# Altium PCB pcb.PcbDoc
Units mil, origin at the board's own origin, x right, y up, seen from the top; angles counter-clockwise.
Board outline 1945 x 1927 mil, 2 copper layers (Top Layer, Bottom Layer); 53 components, 19 nets, 132 pads, 85 vias.
Unrouted connection lines stored in the file: 37.
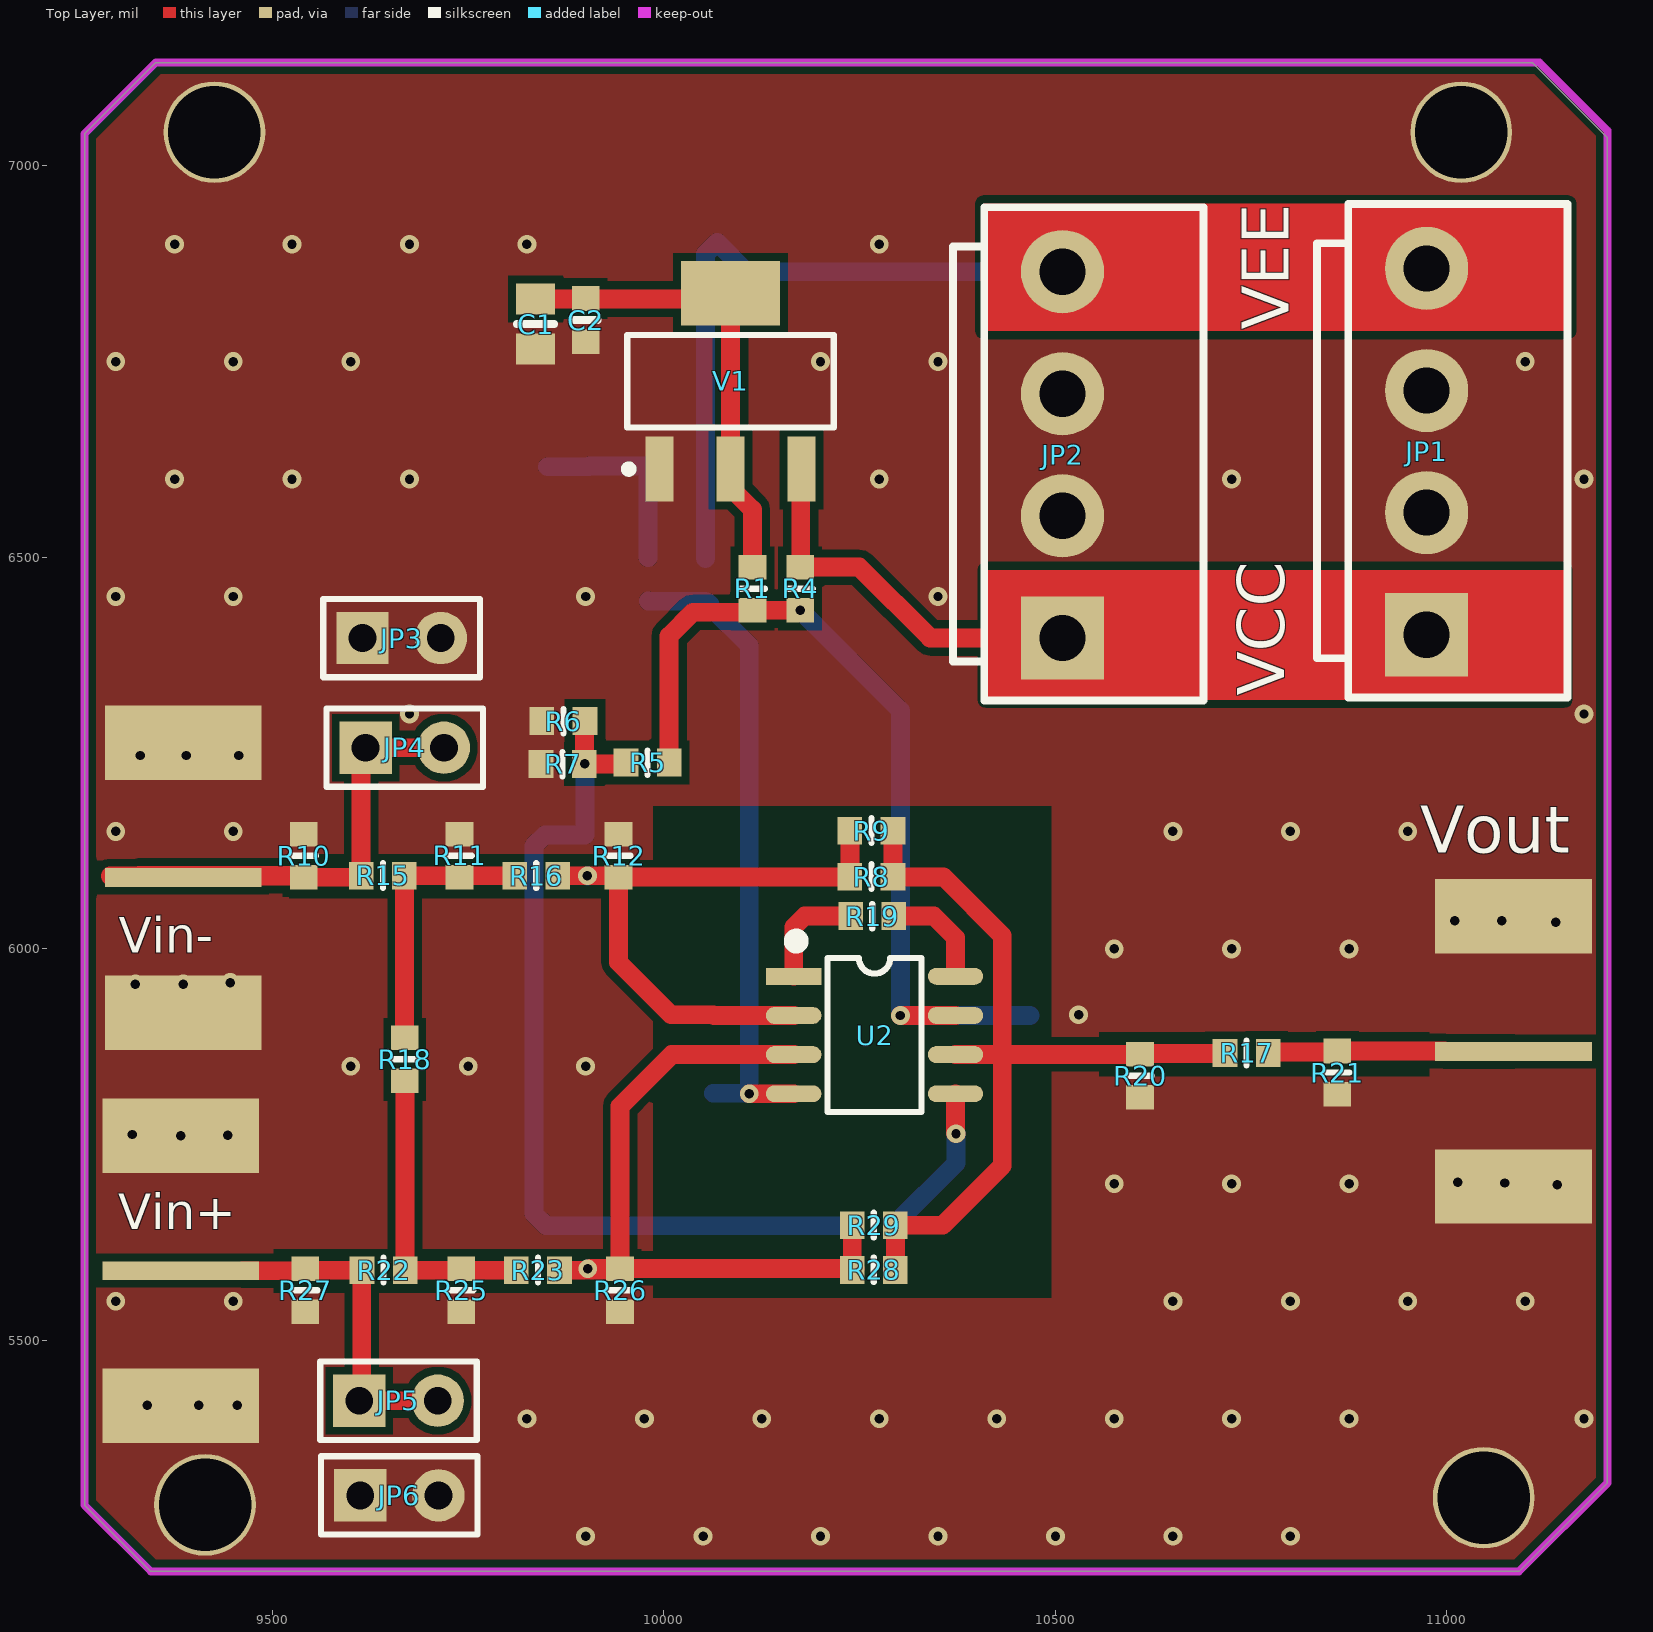
[diagram p0: Top Layer view]
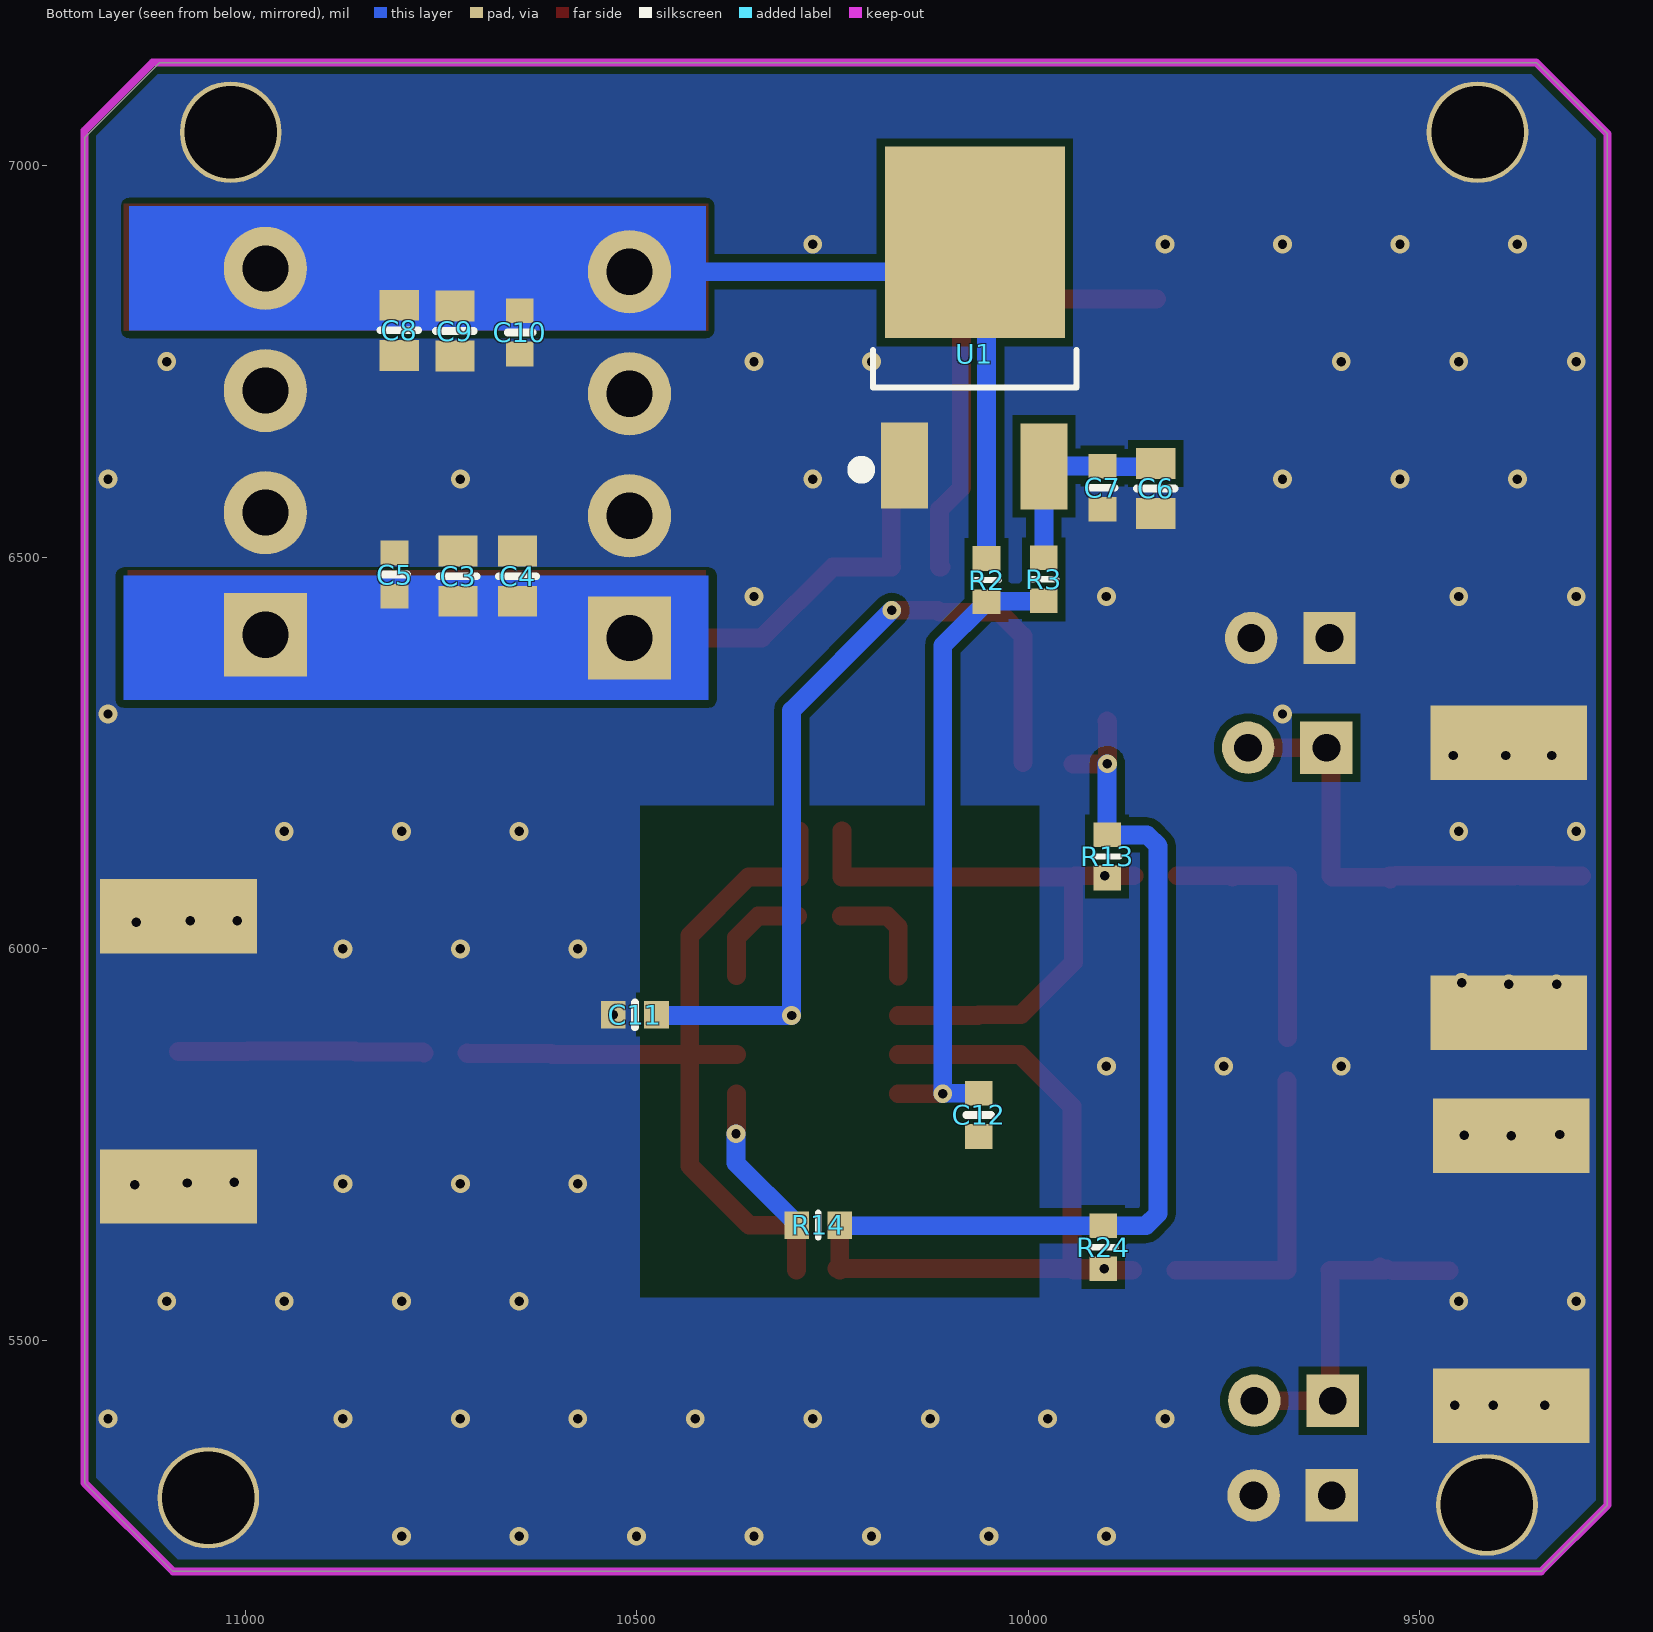
[diagram p1: Bottom Layer view, seen from below]

## Layer stack, top to bottom
Top Solder: solder mask 0.4, Solder Resist, Dk 3.5
Top Layer: signal copper 1.4
Dielectric 1: dielectric 12.6, FR-4, Dk 4.8
Bottom Layer: signal copper 1.4
Bottom Solder: solder mask 0.4, Solder Resist, Dk 3.5

## Board outline
9260,5289.59 9344.59,5205 11092,5205 11205,5318 11205,7036 11109,7132 9351,7132 9260,7041

## Design rules (kind name [scope] priority, off if disabled: settings)
Clearance [All] p1: gap=10 ignorepadtopadclearanceinfootprint=FALSE except(0: Arc-Hole Track-Hole SMDPad-Hole THPad-Hole Via-Hole Fill-Hole Poly-Hole Region-Hole Text-Hole)
PlaneConnect [All] p1: planeconnectstyle=Direct reliefexpansion=20 reliefentries=4 reliefconductorwidth=10 reliefairgap=10
PolygonConnect [All] p1: connectstyle=Direct reliefconductorwidth=10 reliefentries=4 polygonreliefangle="90 Angle" airgapwidth=10
RoutingVias [All] p1: holewidth=28 width=50 viastyle="Through Hole" minholewidth=28 minwidth=50 maxholewidth=28 maxwidth=50
SolderMaskExpansion [All] p1: expansion=4 istentingtop=FALSE
Width Width_1 [All] p1: maxlimit=24 minlimit=24 preferedwidth=24
Width PWR [InNetClass('PWR')] p2: maxlimit=36 minlimit=36 preferedwidth=36
29 further rules are at their usual default settings.

## Components (designator, comment, footprint, x,y, rotation, side; value= is the part's Value field where it differs from the comment)
C1 "Cap-S" C0805-L 9836,6798 r90 top value=10μF
C2 "Cap-S" C0603-L 9900,6803 r90 top value=100nF
C3 "Cap-S" C0805-L 10728,6476 r270 bottom value=47μF
C4 "Cap-S" C0805-L 10652,6476 r270 bottom value=10μF
C5 "Cap-S" C0603-L 10809,6478 r270 bottom value=100nF
C6 "Cap-S" C0805-L 9837,6588 r90 bottom value=10μF
C7 "Cap-S" C0603-L 9905,6589 r90 bottom value=100nF
C8 "Cap-S" C0805-L 10803,6790 r270 bottom value=47μF
C9 "Cap-S" C0805-L 10732,6789 r270 bottom value=10μF
C10 "Cap-S" C0603-L 10649,6787.38 r270 bottom value=100nF
C11 "Cap-S" C0603-L 10502,5916 r0 bottom value=100nF
C12 "Cap-S" C0603-L 10063,5788 r90 bottom value=100nF
JP1 "HDR-1X4" VH3.96-LI-4P 10974,6635.05 r90 top
JP2 "HDR-1X4" VH3.96-LI-4P 10509,6630.95 r90 top
JP3 "HDR-1X2" HDR2.54-LI-2P 9665,6397 r0 top
JP4 "HDR-1X2" HDR2.54-LI-2P 9669,6257 r0 top
JP5 "HDR-1X2" HDR2.54-LI-2P 9661,5423 r0 top
JP6 "HDR-1X2" HDR2.54-LI-2P 9662,5302 r0 top
R1 "R" R0603-L 10113,6460 r270 top value=NC
R2 "R" R0603-L 10053,6471 r270 bottom value=NC
R3 "R" R0603-L 9980,6472 r270 bottom value=NC
R4 "R" R0603-L 10174,6460 r270 top value=NC
R5 "R" R0603-L 9979,6238 r180 top value=NC
R6 "R" R0603-L 9871.56,6291 r180 top value=NC
R7 "R" R0603-L 9870.56,6236 r180 top value=NC
R8 "R" R0603-L 10265,6092 r0 top value=NC
R9 "R" R0603-L 10265,6151 r0 top value=NC
R10 "R" R0603-L 9540,6119 r90 top value=NC
R11 "R" R0603-L 9739,6119 r90 top value=NC
R12 "R" R0603-L 9942,6119 r90 top value=NC
R13 "R" R0603-L 9899,6118 r90 bottom value=NC
R14 "R" R0603-L 10268,5647 r180 bottom value=NC
R15 "R" R0603-L 9641,6093.41 r0 top value=NC
R16 "R" R0603-L 9837,6093.41 r0 top value=NC
R17 "R" R0603-L 10744,5867 r0 top value=NC
R18 "R" R0603-L 9669,5859 r270 top value=NC
R19 "R" R0603-L 10266,6042 r180 top value=NC
R20 "R" R0603-L 10608,5838 r90 top value=NC
R21 "R" R0603-L 10860,5842 r90 top value=NC
R22 "R" R0603-L 9642,5589.59 r0 top value=NC
R23 "R" R0603-L 9839,5589.59 r0 top value=NC
R24 "R" R0603-L 9904,5619 r270 bottom value=NC
R25 "R" R0603-L 9741,5564 r90 top value=NC
R26 "R" R0603-L 9944,5564 r90 top value=NC
R27 "R" R0603-L 9542,5564 r90 top value=NC
R28 "R" R0603-L 10268,5590 r0 top value=NC
R29 "R" R0603-L 10268,5647 r0 top value=NC
U1 "79M05" TO252 10068,6737 r180 bottom
U2 "OPA" SOP8_N 10269,5890 r0 top
V1 "AMS1117-3V3" SOT223_L 10085,6725 r90 top
Vin+ "SMA" SMA1 9383,5589 r0 top (schematic designator Vin+1)
Vin- "SMA" SMA1 9386,6091 r0 top (schematic designator Vin-1)
Vout "SMA" SMA1 11085,5869 r180 top (schematic designator Vout1)

## Footprints (in the part's own frame and the unit in brackets; to place one, negate y for a bottom-side part, rotate by r counter-clockwise, add the part's x,y. Pads: shape width x height; smd on the part's side, far side on the other; paste and mask are expansions set on the pad)
C0603-L [mm] "贴片电容0603 高密度"
  rect 0.8x0.9 smd: 1(-0.7,0) 2(0.7,0)
  silkscreen extent 0,-0.39 0,0.41, body extent -0.8,-0.4 0.8,0.41, height 0.88
C0805-L [mil] "贴片电容0805-高密度"
  rect 39.37x50 smd: 1(-32,0) 2(32,0)
  silkscreen extent 0,-24 0,24, body extent -39,-25 39,25, height 24
HDR2.54-LI-2P [mm] "排针，2脚"
  rect 1.7x1.7 hole 0.9: 1(-1.27,0)
  round 1.7 hole 0.9: 2(1.27,0)
  silkscreen extent -2.54,-1.27 2.54,1.27, body extent -2.54,-1.27 2.54,1.27, height 8.5
R0603-L [mm] "贴片电阻0603 高密度"
  rect 0.8x0.9 smd: 1(-0.7,0) 2(0.7,0)
  silkscreen extent 0,-0.39 0,0.41, body extent -0.81,-0.43 0.79,0.39, height 0.53
SMA1 [mil]
  rect 200x24 smd: 1(0,0)
  rect 200x95 smd: 2(0,-172.5) 2(0,172.5)
  rect 200x95 smd far side: 2(0,-172.5)
  rect 200x95 smd far side mask+4: 2(0,172.5)
  body extent -475,-187 87,187, height 171
SOP8_N [mm] "5*6*1.8mm（长宽高）"
  rect 1.8x0.55 smd: 1(-2.625,1.905)
  oval 1.8x0.55 smd: 2(-2.625,0.635) 3(-2.625,-0.635) 4(-2.625,-1.905) 5(2.625,-1.905) 6(2.625,-0.635) 7(2.625,0.635) 8(2.625,1.905)
  silkscreen extent -2.69,-2.5 1.52,3.2, body extent -3,-2.5 3,2.5, height 1.9
SOT223_L [mm] "SOT223, 4-Leads, Body 6.5x3.5mm, Pitch 2.3mm, Lead Span 7mm, IPC High Density"
  rect 2.1x0.9 smd: 1(-2.85,2.3) 2(-2.85,0) 3(-2.85,-2.3)
  rect 2.1x3.2 smd: 4(2.85,0)
  silkscreen extent -2.97,-3.35 1.5,3.42, body extent -1.85,-3.35 1.85,3.35, height 1.7
TO252 [mil] "252晶体管"
  rect 60x110 smd: 1(-89.55,-119.77) 3(88.45,-120.77)
  rect 230x245 smd: 2(0,165.35)
  silkscreen extent -153,-133 130,28, body extent -128,-120 128,251, height 91
VH3.96-LI-4P [mm] "接插件，25V/5A"
  rect 2.7x2.7 hole 1.5: 1(-5.94,0)
  round 2.7 hole 1.5: 2(-1.978,0) 3(1.982,0) 4(5.942,0)
  silkscreen extent -7.97,-4.57 8.03,3.56, body extent -7.94,-4.4 7.99,4.16, height 10.5

## Part data
C1 C2 C3 C4 C5 C6 C7 C8 C9 C10 C11 C12: "贴片瓷片电容"
JP1 JP2: library part "Header 4", "4P接插件", BOM名称=4P接插件, 学习资源=www.ooocke.com, 版权归属=源创客
JP3 JP4 JP5 JP6: library part "Header 2", "2P接插件", BOM名称=2P接插件, 学习资源=www.ooocke.com, 版权归属=源创客
R1 R2 R3 R4 R5 R6 R7 R8 R9 R10 R11 R12 R13 R14 R15 R16 R17 R18 R19 R20 R21 R22 R23 R24 R25 R26 R27 R28 R29: library part Res, "贴片电阻"
U1: library part 79xx, "线性稳压芯片", BOM名称=线性稳压芯片, 学习资源=www.ooocke.com, 版权归属=源创客
U2: library part OPA277, "双电源高精度运放", BOM名称=双电源高精度运放, 学习资源=www.ooocke.com, 版权归属=源创客
V1: library part AMS1117, "三端稳压芯片", BOM名称=稳压芯片, 学习资源=www.ooocke.com, 版权归属=源创客

## Free pads (board coordinates)
  round 129.92 hole 118.11: 2(9414,5290) 2(9426,7043) 2(11018.3,7043) 2(11046.86,5299.12)

## Via types
v1: diameter 24, hole 12, Top Layer to Bottom Layer, tented both sides, 76 vias
v2: diameter 24, hole 12, Top Layer to Bottom Layer, 9 vias

## Nets (pads, with @x,y where several pads share a name; then routed paths per layer and width w, separated by ;. In a path a pad name is that pad's centre, name@x,y a point inside that pad or via, vN(x,y) a via of type N, cw(c..) or ccw(c..) an arc to the next point about the centre after c; other vN are vias at no path point)
+5: C1.2 C2.2 R1.1 V1.2 V1.4 | length 600.7
  Top Layer w24: C1.2 10071.8,6830 V1.4@10073,6831.2 ; V1.4 V1.2 10085,6589.17 10113,6561.17 R1.1 R1.1@10111.03,6487.56
-5: C6.2 C7.2 R3.1 U1.3 | length 246.1
  Bottom Layer w24: C6.2@9851.44,6615.87 9905,6615.87 C7.2@9905.69,6616.56 ; C7.2 C7.2@9905.69,6616.56 ; R3.1 9979.78,6499.78 9979.78,6616 U1.3 9979.22,6616.56 C7.2@9905.69,6616.56
GND: C1.1 C2.1 C3.1 C4.1 C5.1 C6.1 C7.1 C8.2 C9.2 C10.2 C11.2 C12.1 JP1.2 JP1.3 JP2.2 JP2.3 JP3.1 JP3.2 JP6.1 JP6.2 pad.2 R6.2 R7.2 R10.2 R11.2 R12.2 R20.1 R21.1 R25.1 R26.1 R27.1 U1.1 V1.1 Vin+.2 Vin-.2 Vout.2
  other v1: 9900,5250 10050,5250 10200,5250 10350,5250 10500,5250 10650,5250 10800,5250 9825,5400 9975,5400 10125,5400 10275,5400 10425,5400 10575,5400 10725,5400 10875,5400 11175,5400 9300,5550 9450,5550 10650,5550 10800,5550 10950,5550 11100,5550 11141,5699 10575,5700 10725,5700 10875,5700 11074,5701 11014,5702 9600,5850 9750,5850 9900,5850 9325,5955 9386,5955 9446,5957 10575,6000 10725,6000 10875,6000 11139,6034 11010,6036 11070,6036 9300,6150 9450,6150 10650,6150 10800,6150 10950,6150 9331,6247 9390,6247 9457,6247 9675,6300 11175,6300 9300,6450 9450,6450 9900,6450 10350,6450 9375,6600 9525,6600 9675,6600 10275,6600 10725,6600 11175,6600 9300,6750 9450,6750 9600,6750 10200,6750 10350,6750 11100,6750 9375,6900 9525,6900 9675,6900 9825,6900 10275,6900
  other v2: 9340,5417 9406,5417 9455,5417 9383,5761.5 9443,5762 9321,5763 10529.56,5916
NetJP4_1: JP4.1 JP4.2 R10.1 R15.1 Vin-.1 | length 761.6
  Top Layer w24: Vin-.1@9293,6093 Vin-.1@9371,6093 ; Vin-.1@9330,6094 R10.1@9530.44,6094 ; Vin-.1@9379,6093 9538.44,6093 R10.1 ; R10.1@9537.56,6089 R10.1 ; JP4.1@9613,6237 9613.22,6236.78 9613.22,6093.63 R15.1 9611.47,6091.44 R10.1 ; JP4.1 JP4.2
NetJP5_1: JP5.1 JP5.2 R22.1 R27.2 Vin+.1 | length 419.3
  Top Layer w24: Vin+.1@9462,5589 R27.2@9534.56,5589 ; R27.2 9543.97,5589.59 R22.1@9614,5589.59 ; R27.2@9550.56,5594 R27.2@9553,5591.56 ; JP5.1@9610,5420 9611,5421 JP5.1 JP5.1@9614,5423 ; R22.1 R22.1@9614,5589.59 ; JP5.2 JP5.1@9614,5423 ; JP5.1@9614,5423 R22.1@9614,5589.59
NetR8_1: R8.1 R9.1 R12.1 R13.1 R16.2 U2.2 | length 793.7
  Top Layer w24: R16.2 v2(9902.3,6093.41) 9940.03,6093.41 R12.1 ; U2.2 10064,5915 10063,5916 10009,5916 9942,5983 R12.1 ; R9.1 R8.1 10237.16,6091.72 9942.28,6091.72 R12.1
  Bottom Layer w24: R13.1@9902.3,6092.86 v2(9902.3,6093.41)
NetR8_2: R8.2 R9.2 R17.1 R20.2 R28.2 R29.2 U2.6 | length 1093.4
  Top Layer w24: R9.2 R8.2 10357,6092 10432,6017 10432,5865 10432,5723 10356,5647 R29.2 R28.2 ; U2.6 10372.63,5865.28 10607.72,5865.28 R20.2 10608.72,5866.28 10715.72,5866.28 R17.1
NetR11_1: R11.1 R15.2 R16.1 R18.1 | length 349.5
  Top Layer w24: R18.1 9668.78,5886.78 9668.78,6093.19 R15.2 9737.03,6093.41 R11.1 9740.97,6093.41 R16.1
NetR14_1: R14.1 U2.5 | length 200.3
  Top Layer w24: U2.5 10372.35,5764.65 v1(10373,5764)
  Bottom Layer w24: R14.1 10295.56,5648.97 10373,5726.41 v1(10373,5764)
NetR17_2: R17.2 R21.2 Vout.1 | length 314.7
  Top Layer w24: R17.2 10772.84,5868.28 10858.72,5868.28 R21.2 10996.44,5869.56 10997,5869 Vout.1
NetR18_2: R18.2 R22.2 R23.1 R25.2 | length 384
  Top Layer w24: R18.2 9669.28,5831.16 9669.28,5589.87 R22.2 9739.03,5589.59 R23.1
NetR19_1: R19.1 U2.8 | length 137.3
  Top Layer w24: R19.1@10294.56,6042 10344.52,6042 10372.35,6014.17 U2.8@10372.35,5966.17
NetR19_2: R19.2 U2.1 | length 141.6
  Top Layer w24: U2.1 10165.65,6027.94 10179.71,6042 R19.2
NetR23_2: R23.2 R24.2 R26.2 R28.1 R29.1 U2.3 | length 933.7
  Top Layer w24: R23.2 9942.03,5589.59 R26.2 R26.2@9944,5592 ; v2@9905.44,5592 R26.2@9944,5592 ; U2.3 10010,5865 9944,5799 R26.2@9944,5592 ; R28.1 R28.1@10240.44,5592 ; R29.1 R28.1@10240.44,5592 ; R28.1@10244,5592 R28.1@10240.44,5592 ; R26.2@9944,5592 R28.1@10240.44,5592
  Bottom Layer w24: R24.2@9902,5589.56 R24.2@9904.44,5592
  other v2: 9902.7,5591.41
V+: C11.1 R1.2 R4.2 R5.1 U2.7 | length 1149
  Top Layer w24: R5.1 10006.56,6399.56 10037,6430 10113,6430 10115.44,6432.44 v1(10174,6432.44) ; v1(10302,5915) U2.7
  Bottom Layer w24: v1(10174,6432.44) 10302,6304.44 v1(10302,5915) C11.1@10467.56,5915
V-: C12.2 R2.2 R3.2 U2.4 | length 829.1
  Top Layer w24: v1(10109,5815) U2.4
  Bottom Layer w24: R3.2 9980.5,6443.94 10052.5,6443.94 R2.2 10054.97,6443.44 10058.72,6439.69 10058.72,6437.72 10109,6387.44 v1(10109,5815) 10108.44,5815.56 C12.2
VCC: C3.2 C4.2 C5.2 JP1.1 JP2.1 R4.1 V1.3 | length 575.3
  Top Layer w24: V1.3 10174.78,6612.02 10174.78,6488.33 R4.1 10249.44,6487.56 10339.91,6397.09 JP2.1 JP2.1@10523,6383.09 ; JP1.1 JP1.1@11014.41,6360.78
VEE: C8.1 C9.1 C10.1 JP1.4 JP2.4 R2.1 U1.2 | length 866.5
  Bottom Layer w24: R2.1 10053,6887.35 U1.2 10105.45,6864.91 JP2.4
VREF: R5.2 R6.1 R7.1 R13.2 R14.2 R24.1 | length 1144
  Top Layer w24: R6.1 9898.62,6290.5 v1(9898.62,6236.5) R7.1 R5.2@9942.69,6236
  Bottom Layer w24: v1@9899,6236.5 R13.2 9848.06,6145.56 9834,6131.5 9834,5662.06 9849.5,5646.56 R24.1 R14.2@10240.44,5646.56

## Polygon pours and split planes (outlines as drawn)
GND on Bottom Layer "GND_L02_P000" (solid, pour order 0): 9352,7133 9259,7040 9259,5287 9343,5203 11085,5203 11198,5316 11211,5316 11211,7028 11113,7126 11113,7132
GND on Top Layer "GND_L01_P001" (solid, pour order 1): 9356,7130 9354,7130 9262,7038 9265,7035 9265,5286 9346,5205 9348,5207 11092,5207 11209,5324 11209,7042 11203,7042 11107,7138

## Keep-outs
Keep-Out Layer:
  lines w10: 9260,5289.59 9260,7041 9351,7132 11118,7132 11205,7045 11205,5318 11092,5205 9344.59,5205 9260,5289.59

## Other copper
Top Layer:
  region net VEE: 11155,6789 11155,6952 10408,6952 10408,6789
  region net VCC: 11150,6318 11150,6484 10411,6484 10411,6318
  pour cut-out: 9986,6183 10495,6183 10495,5554 9986,5554
  pour cut-out: 10555,5894.31 10978,5894.31 10978,5837 10555,5837
  pour cut-out: 9521,6121.31 9944,6121.31 9944,6064 9521,6064
  pour cut-out: 9501,5617.31 9924,5617.31 9924,5560 9501,5560
  pour cut-out: 10120.11,5994 10417,5994 10417,5790 10128,5790 10123,5785
Bottom Layer:
  region net VEE: 11148,6790 11148,6949 10411,6949 10411,6790
  region net VCC: 11155,6318 11155,6477 10408,6477 10408,6318
  pour cut-out: 9986,6183 10495,6183 10495,5555 9986,5555

## Silkscreen, mask and mechanical layers (free items; w line width, h text height)
Top Overlay:
  text "VEE" at 10798,6791 h60 r90
  text "VCC" at 10792,6323 h60 r90